# Altium PCB CH340_USB_To_UART.PcbDoc
Units mil, origin at the board's own origin, x right, y up, seen from the top; angles counter-clockwise.
Board outline 1500 x 625 mil, 2 copper layers (Top Layer, Bottom Layer), stack 61.8 mil thick; 15 components, 9 nets, 55 pads, 28 vias.
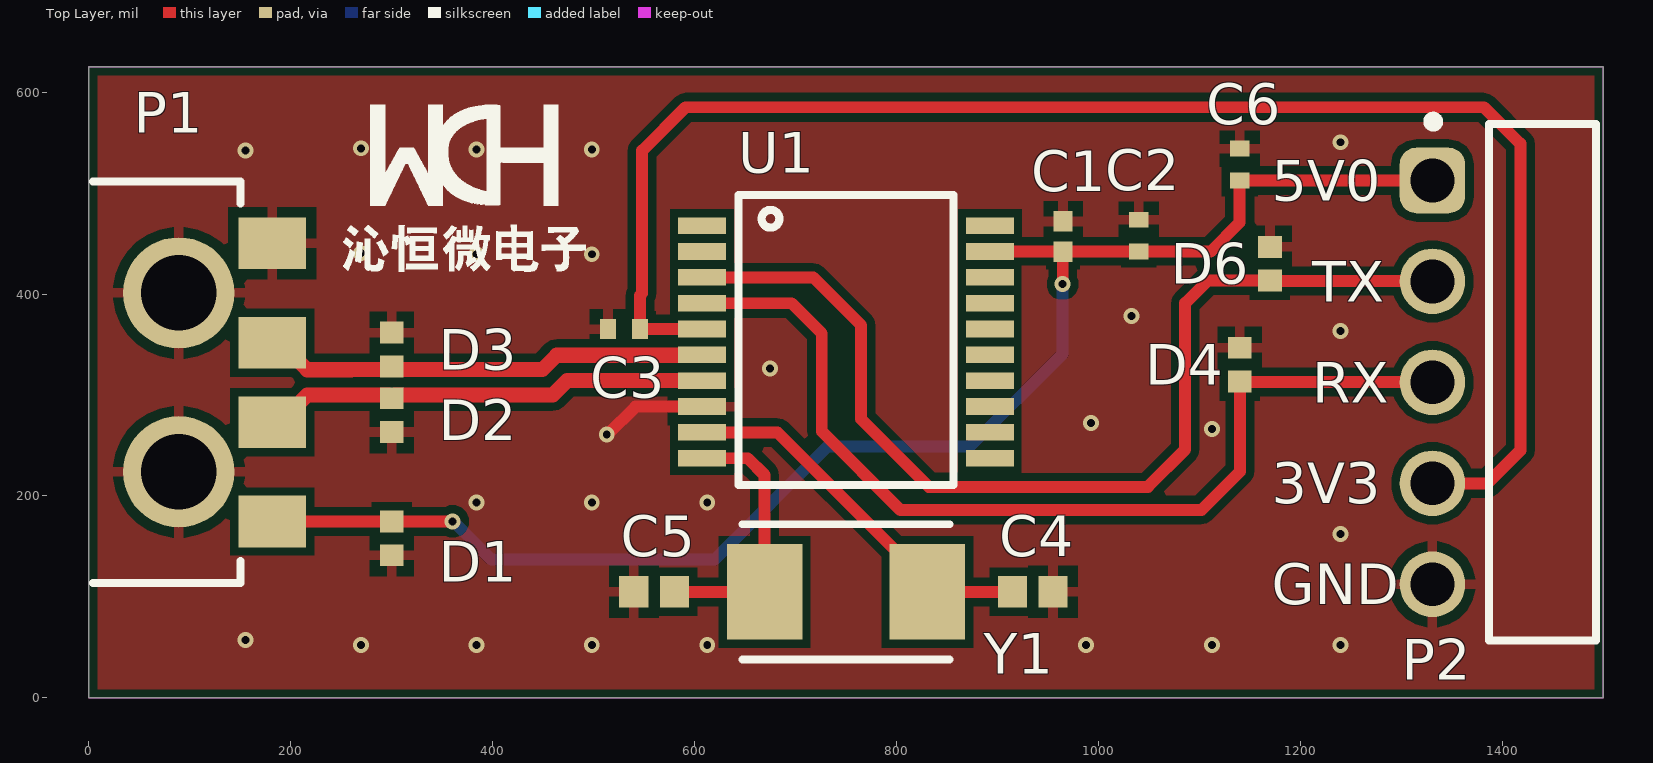
[diagram p0: Top Layer view]
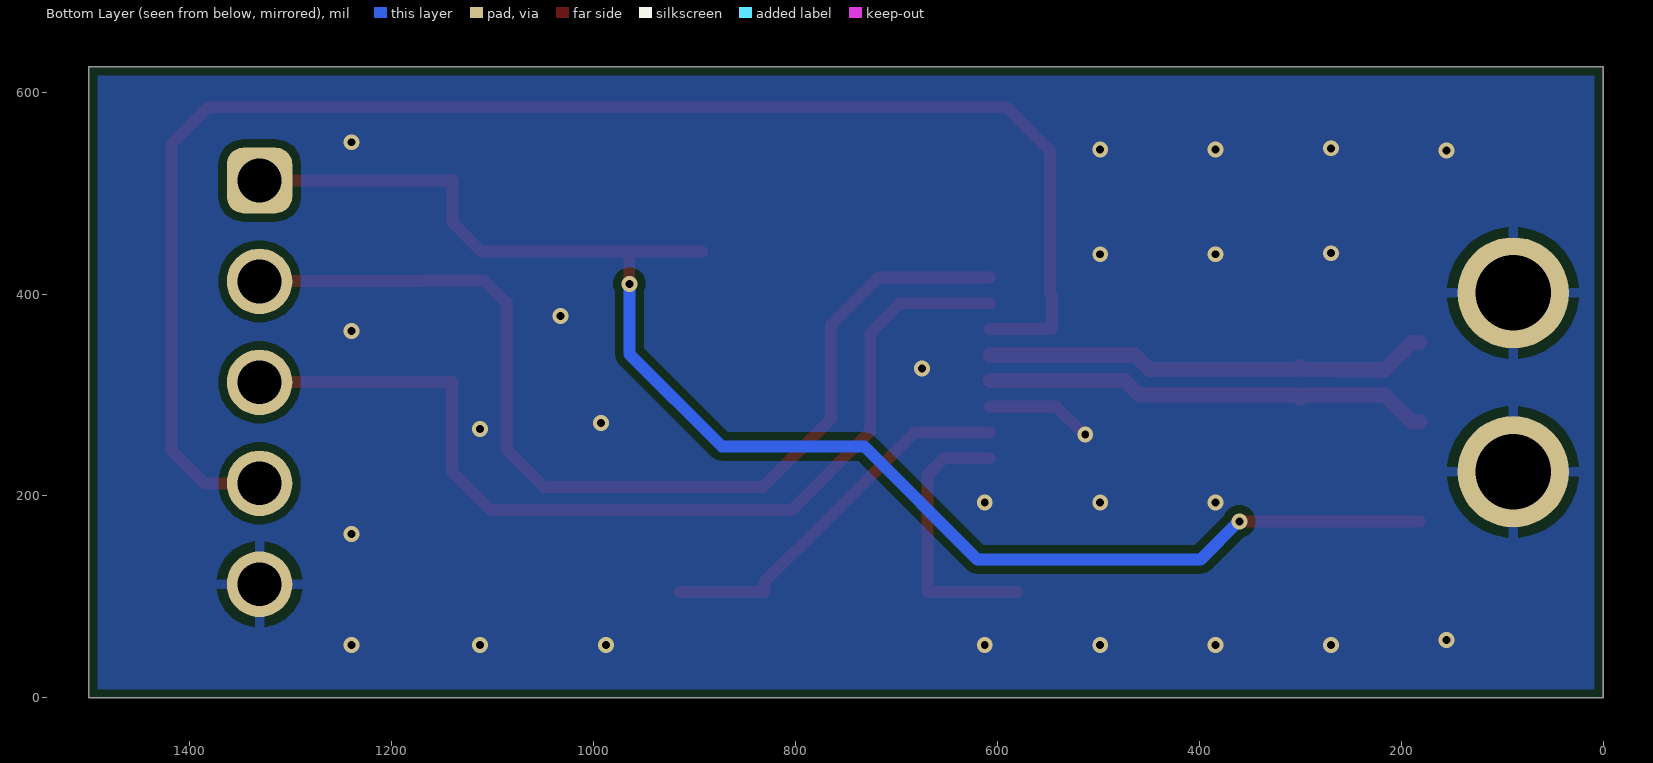
[diagram p1: Bottom Layer view, seen from below]
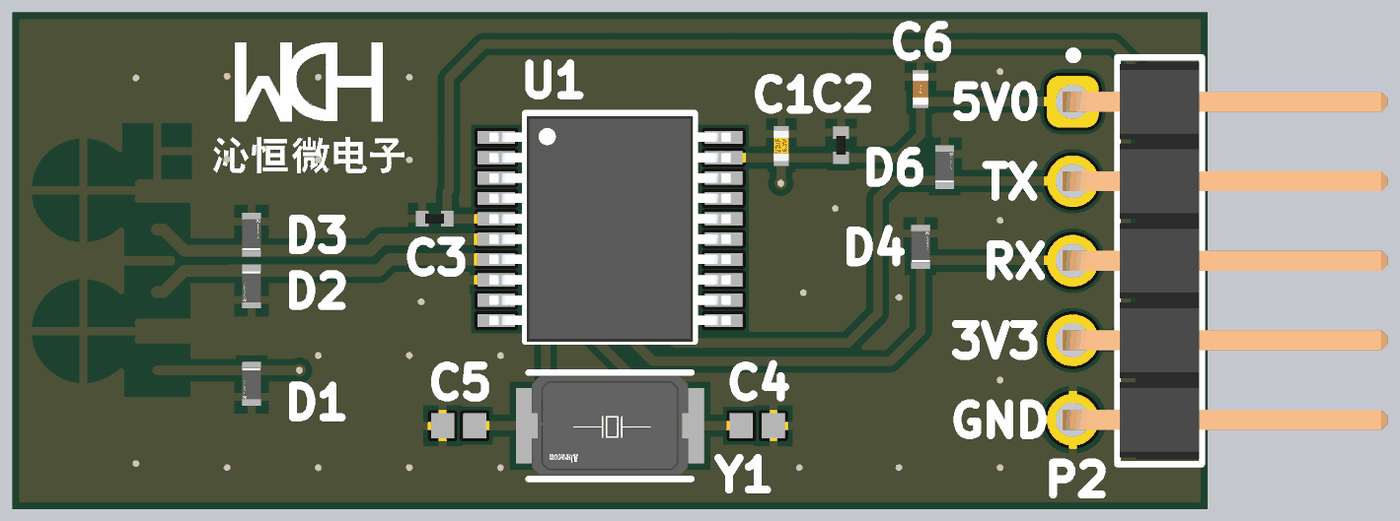
[diagram p2: 3D render of the assembled board from above, using the file's embedded part models]

## Layer stack, top to bottom
Top Solder: solder mask 0.4, Solder Resist, Dk 3.5
Top Layer: signal copper 1.4
Dielectric 1: dielectric 59, FR-4, Dk 4.8
Bottom Layer: signal copper 1.4
Bottom Solder: solder mask 0.4, Solder Resist, Dk 3.5

## Board outline
0,0 0,625 1500,625 1500,0

## Design rules (kind name [scope] priority, off if disabled: settings)
Clearance [All] p1: gap=8 ignorepadtopadclearanceinfootprint=FALSE
DiffPairsRouting [All] p1: maxlimit=10 minlimit=10 mostfreqgap=10 toplayer_minwidth=15 toplayer_maxwidth=15 toplayer_prefwidth=15 bottomlayer_minwidth=15 bottomlayer_maxwidth=15 bottomlayer_prefwidth=15 maxuncoupledlength=500
MinimumSolderMaskSliver [All] p1: minsoldermaskwidth=1
PolygonConnect [All] p1: thpad.connectstyle=Relief thpad.reliefconductorwidth=10 thpad.reliefentries=4 thpad.polygonreliefangle="90 Angle" thpad.airgapwidth=10 smdpad.connectstyle=Relief smdpad.reliefconductorwidth=10 smdpad.reliefentries=4 smdpad.polygonreliefangle="90 Angle" smdpad.airgapwidth=10 via.connectstyle=Direct via.reliefconductorwidth=10 via.reliefentries=4 via.polygonreliefangle="90 Angle" via.airgapwidth=10
RoutingVias [All] p1: holewidth=47.24 width=31.5 viastyle="Through Hole" minholewidth=7.87 minwidth=15.75 maxholewidth=31.5 maxwidth=39.37
SilkToSolderMaskClearance [IsPad] p1: minsilkscreentomaskgap=8 clearancetoexposedcopper=TRUE
SolderMaskExpansion [All] p1: expansion=4 istentingtop=FALSE
Width Width_Power [InNetClass('3V3') And InNetClass('VBUS')  And InNetClass('GND')] p1: maxlimit=10 minlimit=10 preferedwidth=10
Width Width_Signal [All] p2: maxlimit=11.81 minlimit=5.91 preferedwidth=7.87
27 further rules are at their usual default settings.

## Classes and differential pairs
differential pair DATA: +DATA_P -DATA_N

## Components (designator, comment, footprint, x,y, rotation, side; value= is the part's Value field where it differs from the comment)
C1 "CL05A226MQ5N6J8" FP-CL05A226MQ5N6J8-IPC_C 965,456.97 r90 top value=22uF
C2 "GRM155R71C104KA88D" FP-GRM15-MFG 1040,457.81 r270 top value=0.1μF
C3 "GRM155R71C104KA88D" FP-GRM15-MFG 530,365.3 r0 top value=0.10μF
C4 "0402ZK220GBSTR.." CAPC1006X50X20ML10T10 935,105 r180 top
C5 "0402ZK220GBSTR.." CAPC1006X50X20ML10T10 560,105 r0 top
C6 "C1005X7R1C104K050BC" FP-C1005-050-0_05-MFG 1140,528.25 r90 top
D1 "UCLAMP3601P.TNT" FP-SLP1006P2-MFG 300,157.97 r90 top
D2 "UCLAMP3601P.TNT" FP-SLP1006P2-MFG 300,280.07 r90 top
D3 "UCLAMP3601P.TNT" FP-SLP1006P2-MFG 300,345.06 r270 top
D4 "UCLAMP3601P.TNT" FP-SLP1006P2-MFG 1140,330 r270 top
D6 "UCLAMP3601P.TNT" FP-SLP1006P2-MFG 1170,430 r270 top
P1 "629004113921" 629004113921 -220,312.5 r270 top
P2 "61300511021" 61300511021 1440,312.5 r90 top
U1 "CH340T" SSOP20W 750,352.5 r270 top
Y1 "ABM3-12.000MHZ-D2Y-T" FP-ABM3-MFG 750,105 r180 top

## Footprints (in the part's own frame and the unit in brackets; to place one, negate y for a bottom-side part, rotate by r counter-clockwise, add the part's x,y. Pads: shape width x height; smd on the part's side, far side on the other; paste and mask are expansions set on the pad)
61300511021 [mm] "Pin Header, pitch 2.54 mm, THT, Angled, single row, 5p"
  rrect50% 1.65x1.65 hole 1.1: 1(5.08,2.77)
  round 1.65 hole 1.1: 2(2.54,2.77) 3(0,2.77) 4(-2.54,2.77) 5(-5.08,2.77)
  silkscreen extent -6.5,-1.35 6.68,2.87, body extent -6.35,-7.27 6.35,3.09, height 2.58
629004113921 [mm] "USB 2.0 Plug Type A SMT with Clip"
  rect 1.3x1.7 smd: 1(3.5,10.2) 2(1,10.2) 3(-1,10.2) 4(-3.5,10.2)
  round 2.8 hole 1.9: Shell(-2.25,7.85) Shell(2.25,7.85)
  silkscreen extent -5.05,5.69 5.05,9.4, body extent -6,-9.4 6,10.4, height 2.25
CAPC1006X50X20ML10T10 [mm] "Chip Capacitor, 2-Leads, Body 1.00x0.55mm, IPC Low Density"
  rect 0.74x0.8 smd: 1(-0.51,0) 2(0.51,0)
  body extent -0.55,-0.33 0.55,0.32, height 0.5
FP-ABM3-MFG [mm]
  rect 1.9x2.4 smd paste+0 mask+0: 1(-2.05,0) 2(2.05,0)
  silkscreen extent -2.6,-1.7 2.6,1.7, body extent -3.1,-1.8 3.1,1.8, height 0.25
FP-C1005-050-0_05-MFG [mm]
  rect 0.4x0.5 smd paste+0 mask+0: 1(-0.4,0) 2(0.4,0)
  body extent -0.7,-0.38 0.7,0.38, height 0.25
FP-CL05A226MQ5N6J8-IPC_C [mil]
  rect 20.29x18.6 smd paste+0 mask+0: 1(-14.9,0) 2(14.9,0)
  body extent -29,-15 29,15, height 10
FP-GRM15-MFG [mm]
  rect 0.4x0.5 smd paste+0 mask+0: 1(-0.4,0) 2(0.4,0)
  body extent -0.7,-0.38 0.7,0.38, height 0.25
FP-SLP1006P2-MFG [mm]
  rect 0.55x0.6 smd paste+0 mask+0: 1(-0.425,0) 2(0.425,0)
  body extent -0.8,-0.45 0.8,0.45, height 0.25
SSOP20W [mm]
  rect 0.42x1.2 smd: 1(-2.925,-3.625) 2(-2.275,-3.625) 3(-1.625,-3.625) 4(-0.975,-3.625) 5(-0.325,-3.625) 6(0.325,-3.625) 7(0.975,-3.625) 8(1.625,-3.625) 9(2.275,-3.625) 10(2.925,-3.625) 11(2.925,3.625) 12(2.275,3.625) 13(1.625,3.625) 14(0.975,3.625) 15(0.325,3.625) 16(-0.325,3.625) 17(-0.975,3.625) 18(-1.625,3.625) 19(-2.275,3.625) 20(-2.925,3.625)
  silkscreen extent -3.7,-2.7 3.6,2.7, body extent -3.6,-3.85 3.6,3.85, height 1.6

## Part data
C1: library part CMP-13271-000001-1, "CAP CER 22UF 6.3V X5R 0402", Capacitance=22uF, Manufacturer="Samsung Electro-Mechanics", Package=0402, Temperature="-55°C to +85°C", Temperature Characteristic=X5R, Temperature Coefficient=15%, Temperature Range High=+85°C, Temperature Range Low=-55°C, Tolerance=20%, Voltage Rating=6.3V, Automotive=No, Category=Cap, ComponentLink2Description=Datasheet, ComponentLink2URL=http://www.samsungsem.com/kr/support/library/product-catalog/__icsFiles/afieldfile/2018/11/28/MLCC.pdf, Device Class L1="Passive Components", Device Class L2=Capacitors, Device Class L3="Ceramic Capacitors", Digikey Description="CAP CER 22UF 6.3V X5R 0402", Height=0.55mm, Ipc Land Pattern Name=CAPC10050X50, Lead Free=Yes, Manufacturer Part Number=CL05A226MQ5N6J8, Material=Ceramic, Octopart=https://octopart.com/cl05a226mq5n6j8-samsung-82337113, RoHS=TRUE
C2: library part CMP-2100-03641-2, "CAP CER 0.1UF 16V X7R 0402", Capacitance=0.1μF, Manufacturer=Murata, Package=GRM15, Temperature="-55°C to +125°C", Temperature Characteristic=X7R, Temperature Range High=+125°C, Temperature Range Low=-55°C, Tolerance=10%, Voltage Rating=16Vdc, Category=Cap, ComponentLink2Description=Datasheet, ComponentLink2URL=https://search.murata.co.jp/Ceramy/image/img/A01X/G101/ENG/GRM155R71H471KA01-01A.pdf, Device Class L1="Passive Components", Device Class L2=Capacitors, Device Class L3="Ceramic Capacitors", Digikey Description="CAP CER 0.1UF 16V X7R 0402", Height=0.55mm, Ipc Land Pattern Name=CAPC10050X219, Lead Free=yes, Manufacturer Part Number=GRM155R71C104KA88D, Material=Ceramic, Mouser Description="0402 0.1 uF 16V ±10 % Tolerance X7R SMT Multilayer Ceramic Capacitor", Octopart=https://octopart.com/grm155r71c104ka88d-murata-196880, RoHS=TRUE, Standoff Height=0mm
C3: library part CMP-2100-03641-2, "CAP CER 0.1UF 16V X7R 0402", Capacitance=0.10μF, Manufacturer=Murata, Package=GRM15, Temperature="-55°C to +125°C", Temperature Characteristic=X7R, Temperature Range High=+125°C, Temperature Range Low=-55°C, Tolerance=10%, Voltage Rating=16Vdc, Category=Cap, ComponentLink2Description=Datasheet, ComponentLink2URL=https://search.murata.co.jp/Ceramy/image/img/A01X/G101/ENG/GRM155R71H471KA01-01A.pdf, Device Class L1="Passive Components", Device Class L2=Capacitors, Device Class L3="Ceramic Capacitors", Digikey Description="CAP CER 0.1UF 16V X7R 0402", Height=0.55mm, Ipc Land Pattern Name=CAPC10050X219, Lead Free=yes, Manufacturer Part Number=GRM155R71C104KA88D, Material=Ceramic, Mouser Description="0402 0.1 uF 16V ±10 % Tolerance X7R SMT Multilayer Ceramic Capacitor", Octopart=https://octopart.com/grm155r71c104ka88d-murata-196880, RoHS=TRUE, Standoff Height=0mm
C4 C5: library part CMP-2008-04844-1, Capactance=22pF, Manufacturer="AVX Interconnect / Elco", Part Number=0402ZK220GBSTR..
C6: library part CMP-08246-004182-1, "Multilayer Ceramic Capacitors 100nF ±10% 16V X7R SMD 0402", Capacitance=100nF, Case Code (Imperial)=0402, Case Code (Metric)=1005, Dielectric=X7R, Dielectric Material=Ceramic, Max Operating Temperature=125°C, Min Operating Temperature=-55°C, Package Quantity=1, Tolerance=10%, Voltage=16V, Case/Package=0402, Construction=Flat, Depth=0.5mm, Height=0.5mm, Lead Free="Lead Free", Length=1mm, Mount="Surface Mount", Number of Pins=2, Packaging="Tape and Reel", Radiation Hardening=No, Resistor Type=Ceramic, RoHS Compliant=Yes, Series=C, Termination=SMD/SMT, Thickness=0.022inch, Voltage Rating=16V, Voltage Rating (DC)=16V, Weight=2.3E-05oz, Width=0.02inch
D1 D2 D3 D4 D6: library part CMP-56445-000005-1, "TVS DIODE 33VWM 60VC SLP1006P2", Case Code (Imperial)=0402, Case Code (Metric)=1006, Case/Package=SMD/SMT, Clamping Voltage=60V, Leakage Current=1uA, Max Breakdown Voltage=45V, Max Operating Temperature=125°C, Min Breakdown Voltage=36V, Min Operating Temperature=-40°C, Peak Pulse Current=2A, Peak Pulse Power=125W, Power Dissipation=170W, Power Line Protection=No, Resistor Type=Zener, Reverse Standoff Voltage=33V, Clamping Voltage-Max=60V, Depth=0.6mm, Diode Type=ZENER, Direction=Unidirectional, Element Configuration=Single, Lead Free="Lead Free", Length=1mm, Mount="Surface Mount", Number of Pins=2, Number of Unidirectional Channels=1, Packaging="Tape and Reel", Radiation Hardening=No, RoHS Compliant=Yes, Series="Automotive, AEC-Q100, uClamp®", Working Voltage=33V
P1: library part CMP-1502-03242-2, Contact Resistance=20mΩ, Current Rating=1.5A, Insulation Resistance=1GΩ, Max Operating Temperature=105°C, Min Operating Temperature=-40°C, Operating Supply Voltage=30V, Connector Type=USB, Contact Plating=Gold, Features=Shielded, Gender=Male, Lead Free="Lead Free", Length=18.8mm, Mount="Horizontal, Surface Mount", NexarPartId=19991169, Number of Contacts=4, Number of Pins=4, Orientation=Horizontal, REACH SVHC=Unknown, RoHS=Compliant, Termination=SMD/SMT, USB Standard="USB 2.0"
P2: library part CMP-1502-01067-3, Color=Black, Contact Resistance=20mΩ, Current Rating=3A, Operating Supply Voltage=250V, Connector Type="Male Pin", Contact Material=Copper, Contact Mating Length=5.9944mm, Contact Plating=Gold, Gender=Male, Lead Pitch=2.54mm, Mount="Through Hole", NexarPartId=32855525, Number of Contacts=5, Number of Pins=5, Number of Positions=5, Number of Rows=1, Packaging=Bulk, Pitch=2.54mm, REACH SVHC=Unknown, RoHS=Compliant, Termination=Solder
U1: "Interface Development Tools USB - Serial Convert with CH340T", Package=None, Check_prices=https://www.snapeda.com/parts/CH340T/WCH/view-part/?ref=eda, MF=wch, MP=CH340T, SnapEDA_Link=https://www.snapeda.com/parts/CH340T/WCH/view-part/?ref=snap
Y1: library part CMP-27762-007917-1, "Crystal 12MHz ±20ppm 18pF SMD-2 5mm x 3.2mm", Case/Package=CSMD, ESR (Equivalent Series Resistance)=60R, Frequency=12MHz, Frequency Stability=30ppm, Frequency Tolerance=20ppm, Load Capacitance=18pF, Max Operating Temperature=85°C, Min Operating Temperature=-40°C, Operating Frequency="12 MHz", Package Quantity=1000, Resistor Type=Ceramic, Depth=3.2mm, Height=0.051inch, Lead Free="Lead Free", Length=5mm, Mount="Surface Mount", Number of Pins=2, Packaging="Tape and Reel", Parameter 1=12MHz, Radiation Hardening=No, Series=ABM3, Series Resistance=60R, Termination=SMD/SMT, Tolerance=20ppm, Width=0.126inch

## Via types
v1: diameter 15.75, hole 7.87, Top Layer to Bottom Layer, tented both sides, 28 vias

## Nets (pads, with @x,y where several pads share a name; then routed paths per layer and width w, separated by ;. In a path a pad name is that pad's centre, name@x,y a point inside that pad or via, vN(x,y) a via of type N, cw(c..) or ccw(c..) an arc to the next point about the centre after c; other vN are vias at no path point)
3V3: C3.2 P2.4 U1.5 | length 1546.4
  Top Layer w11.81: U1.5 C3.2 545.75,398.51 548,400.76 548,542 591,585 1382,585 1418,549 1418,245 1385.5,212.5 P2.4
DATA_N: D2.2 P1.2 U1.7 | length 445.6
  Top Layer w15: P1.2 189.45,273.13 216.32,300 269.94,300 270,300.06 296.74,300.06 D2.2 303.26,300.06 459.46,300.06 473.81,314.41 607.17,314.41 U1.7@607.28,314.29
DATA_P: D3.2 P1.3 U1.6 | length 445.6
  Top Layer w15: P1.3 189.45,351.87 216.32,325 259.58,325 259.64,325.06 296.74,325.06 D3.2 303.26,325.06 449.1,325.06 463.45,339.41 607.17,339.41 U1.6@607.28,339.29
GND: C1.2 C2.1 C3.1 C4.1 C5.1 C6.2 D1.1 D2.1 D3.1 D4.1 D6.1 P1.4 P1.Shell P2.5 U1.8 | length 105.7
  Top Layer w11.81: v1(513,261) 514,261 541.52,288.52 U1.8
  other v1: 269.39,52.37 383.79,52.37 498.18,52.37 612.58,52.37 987.75,52.37 1112.75,52.37 1239.75,52.37 155,57.37 1239.75,162.37 383.79,193.37 498.18,193.37 612.58,193.37 1112.75,266.37 992.75,272.37 674.75,326.37 1239.75,363.37 1032.75,378.37 383.79,439.43 498.18,439.43 269.39,440.43 155,542.37 383.79,543.37 498.18,543.37 269.39,544.37 1239.75,550.37
NetC4_2: C4.2 U1.9 Y1.1 | length 378.8
  Top Layer w11.81: U1.9 682.07,262.93 798.66,146.34 799.21,146.34 830.71,114.84 Y1.1 C4.2
NetC5_2: C5.2 U1.10 Y1.2 | length 273.8
  Top Layer w11.81: C5.2 Y1.2 669.29,220.71 652.66,237.34 U1.10
RX: D4.2 P2.3 U1.4 | length 969.9
  Top Layer w11.81: U1.4 696.11,390.89 726,361 726,264 804,186 1102,186 1140.38,224.38 1140.38,312.88 1330.56,312.88 P2.3
TX: D6.2 P2.2 U1.3 | length 1033.9
  Top Layer w11.81: U1.3 717.52,416.48 765,369 765,276 832,209 1049,209 1086,246 1086,391 1108.27,413.27 D6.2 1170.38,412.88 1330.56,412.88 P2.2
VBUS: C1.1 C2.2 C6.1 D1.2 P1.1 P2.1 U1.19 | length 1476.6
  Top Layer w11.81: P1.1 D1.2 v1(360.35,174.7) ; U1.19 C1.1 ; v1(964.5,410) 964.75,410.25 964.75,441.82 C1.1 ; P2.1 C6.1 1140,470.92 1111.15,442.07 C2.2 C1.1
  Bottom Layer w11.81: v1@360.35,175.35 398.7,137 620,137 732,249 873,249 964.5,340.5 v1(964.5,410)
pads on no net: U1.1 U1.2 U1.11 U1.12 U1.13 U1.14 U1.15 U1.16 U1.17 U1.18 U1.20

## Polygon pours and split planes (outlines as drawn)
GND on Bottom Layer "GND_L02_P001" (solid, remove dead copper, pour order 1): 0,0 0,625 1500,625 1500,0
GND on Top Layer "GND_L01_P002" (solid, pour order 2): 0,0 0,625 1500,625 1500,0

## Keep-outs
Keep-Out Layer:
  the board outline again, w1

## Silkscreen, mask and mechanical layers (free items; w line width, h text height)
Top Overlay:
  drawing of 17 lines, arcs and shapes, not listed
  text "5V0" at 1172,492.51 h40
  text "TX" at 1211.99,392.51 h40
  text "RX" at 1211.99,292.51 h40
  text "3V3" at 1172,192.51 h40
  text "GND" at 1172,92.51 h40

## Dimensions
1500,625 to 1500,0 on Bottom Solder
0,625 to 1500,625 on Bottom Solder

## Text inside footprints (layer, text, board x,y; h text height)
P1: Mechanical 2 "PCB Edge" at -40.87,391.24 h24 r270